# EAGLE board SSOP SOIC (EAGLE 6.3)
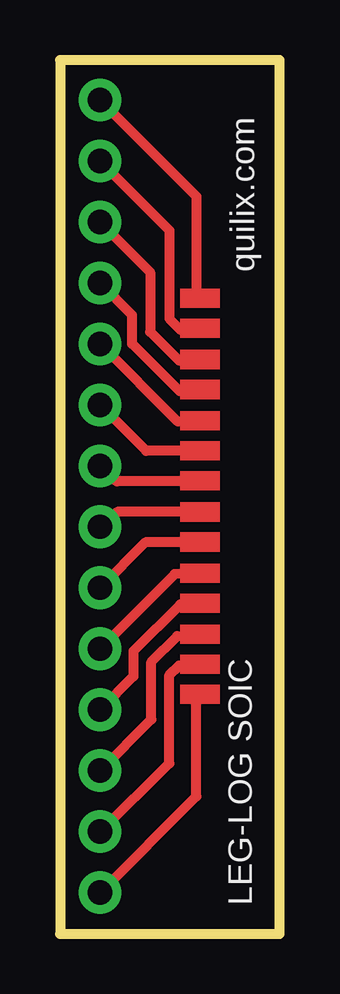
[diagram p0: board, top side]
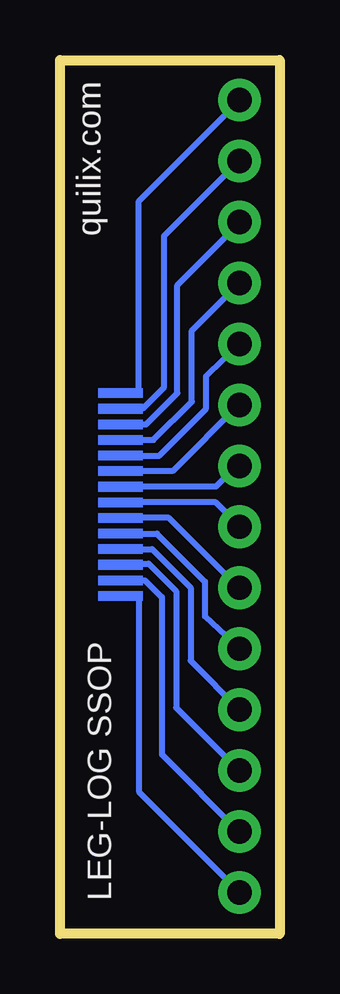
[diagram p1: board, bottom side, seen from below]

Size 9.15 x 36.41 mm. Coordinates in mm from the lower left corner, seen from the top.
Outline: 0,36.41 0,0 9.15,0 9.15,36.41 0,36.41
Copper layers (1*16): Top 0.035mm / dielectric 1.5mm / Bottom 0.035mm
Design rules "default": minimum track width 10mil, minimum drill 24mil, track to track 8mil, track to pad 8mil, pad to pad 8mil, via to via 8mil, smd to smd 8mil, copper to edge 40mil, drill to drill 8mil, minimum pad ring 10mil, minimum via ring 8mil, stop-mask expansion 4mil, vias tented up to drill 0mil, thermal gap 10mil
tRestrict: area 5,26.1 to 6.7,26.9; area 5,24.8 to 6.7,25.6; area 5,23.5 to 6.7,24.3; area 5,22.3 to 6.7,23.1; area 5,21 to 6.7,21.8; area 5,19.7 to 6.7,20.5; area 5,18.5 to 6.7,19.3; area 5,17.2 to 6.7,18; area 5,15.9 to 6.7,16.7; area 5,14.6 to 6.7,15.4; area 5,13.4 to 6.7,14.2; area 5,12.1 to 6.7,12.9; 2 more areas
bRestrict: area 5.7,21 to 7.6,21.4; area 5.7,20.4 to 7.6,20.8; area 5.7,19.1 to 7.6,19.5; area 5.7,15.8 to 7.6,16.2; area 5.7,15.2 to 7.6,15.6; area 5.7,22.3 to 7.6,22.7; area 5.7,21.7 to 7.6,22.1; area 5.7,19.7 to 7.6,20.1; area 5.7,18.4 to 7.6,18.8; area 5.7,17.8 to 7.6,18.2; area 5.7,17.1 to 7.6,17.5; area 5.7,16.5 to 7.6,16.9; 2 more areas

## Footprints (pad centres in the part's own frame; a part is rotated, then mirrored left to right if it is on the bottom)
1X14-CB = drill 1.016 pad 1.778: 1 -16.51,0; 2 -13.97,0; 3 -11.43,0; 4 -8.89,0; 5 -6.35,0; 6 -3.81,0; 7 -1.27,0; 8 1.27,0; 9 3.81,0; 10 6.35,0; 11 8.89,0; 12 11.43,0; 13 13.97,0; 14 16.51,0

## Placement (x,y rotation side)
E$2  [1X14-CB]  1.67,18.23 90 top

## Library data of the parts
E$2 = adafruit

## Nets
S$1: E$2.14
S$2: E$2.13
S$3: E$2.12
S$4: E$2.11
S$5: E$2.10
S$6: E$2.9
S$7: E$2.8
S$8: E$2.7
S$9: E$2.6
S$10: E$2.5
S$11: E$2.4
S$12: E$2.3
S$13: E$2.2
S$14: E$2.1

## Tracks (layer width: path | path; a pad name or v marks a point on that pad's centre or on a via)
S$1
  Top 0.406: E$2.14 5.68,30.73 5.68,26.47
S$2
  Top 0.406: E$2.13 4.56,29.31 4.56,25.63 5.04,25.15 5.68,25.2
S$3
  Top 0.406: E$2.12 3.76,27.57 3.76,25.08 4.96,23.88 5.68,23.93
S$4
  Top 0.406: 5.68,22.66 4.98,22.61 3.01,24.58 3.01,25.78 E$2.11
S$5
  Top 0.406: 5.68,21.39 4.91,21.34 E$2.10
S$6
  Top 0.406: 5.68,20.12 3.59,20.12 E$2.9
S$7
  Top 0.406: 5.68,18.85 2.37,18.85 E$2.8
S$8
  Top 0.406: 5.68,17.58 2.39,17.58 E$2.7
S$9
  Top 0.406: 5.68,16.31 3.56,16.31 E$2.6
S$10
  Top 0.406: 5.68,15.04 4.78,14.99 E$2.5
S$11
  Top 0.406: 5.68,13.77 5,13.72 3.06,11.78 3.06,10.73 E$2.4
S$12
  Top 0.406: E$2.3 3.81,8.94 3.81,11.33 4.88,12.4 5.68,12.5
S$13
  Top 0.406: E$2.2 4.56,7.1 4.56,10.78 4.96,11.18 5.68,11.23
S$14
  Top 0.406: E$2.1 5.68,5.73 5.68,9.96
S$15
  Bottom 0.254: 1.61,16.93 2.66,17.98 5.96,17.98
S$16
  Bottom 0.254: 1.76,19.53 2.66,18.63 5.91,18.63
S$17
  Bottom 0.254: 1.66,22.08 4.46,19.28 5.96,19.28
S$18
  Bottom 0.254: 1.66,14.38 4.61,17.33 5.96,17.33
S$19
  Bottom 0.254: 5.91,16.68 5.11,16.68 3.11,14.68 3.11,13.23 1.66,11.88
S$20
  Bottom 0.254: 5.91,19.93 5.01,19.93 3.06,21.88 3.06,23.23 1.66,24.58
S$21
  Bottom 0.254: 5.86,20.58 5.26,20.58 3.66,22.18 3.66,25.13 1.66,27.13
S$22
  Bottom 0.254: 5.96,16.03 5.31,16.03 3.71,14.43 3.71,11.38 1.61,9.28
S$23
  Bottom 0.254: 5.91,21.23 5.56,21.23 4.26,22.53 4.26,27.03 1.61,29.68
S$24
  Bottom 0.254: 5.91,21.88 5.71,21.88 4.81,22.78 4.81,29.08 1.66,32.23
S$25
  Bottom 0.254: 5.86,22.53 5.86,30.53 1.66,34.73
S$26
  Bottom 0.254: 5.86,15.43 5.46,15.43 4.31,14.28 4.31,9.43 1.66,6.78
S$27
  Bottom 0.254: 5.91,14.73 5.61,14.73 4.91,14.03 4.91,7.48 1.61,4.18
S$28
  Bottom 0.254: 5.86,14.08 5.86,5.93 1.61,1.68
(copper drawn outside any net)
  shapes: Bottom area x14, Top area x14

## Text on the board
_tsilk: quilix.com | LEG-LOG SOIC
_bsilk: quilix.com | LEG-LOG SSOP